# Altium PCB BOC1_06.PcbDoc (part 2 of 4)
Units mil, origin at the board's own origin, x right, y up, seen from the top; angles counter-clockwise.
Board outline 7900 x 6500 mil, 2 copper layers (Top Layer, Bottom Layer); 312 components, 413 nets, 1710 pads, 368 vias.
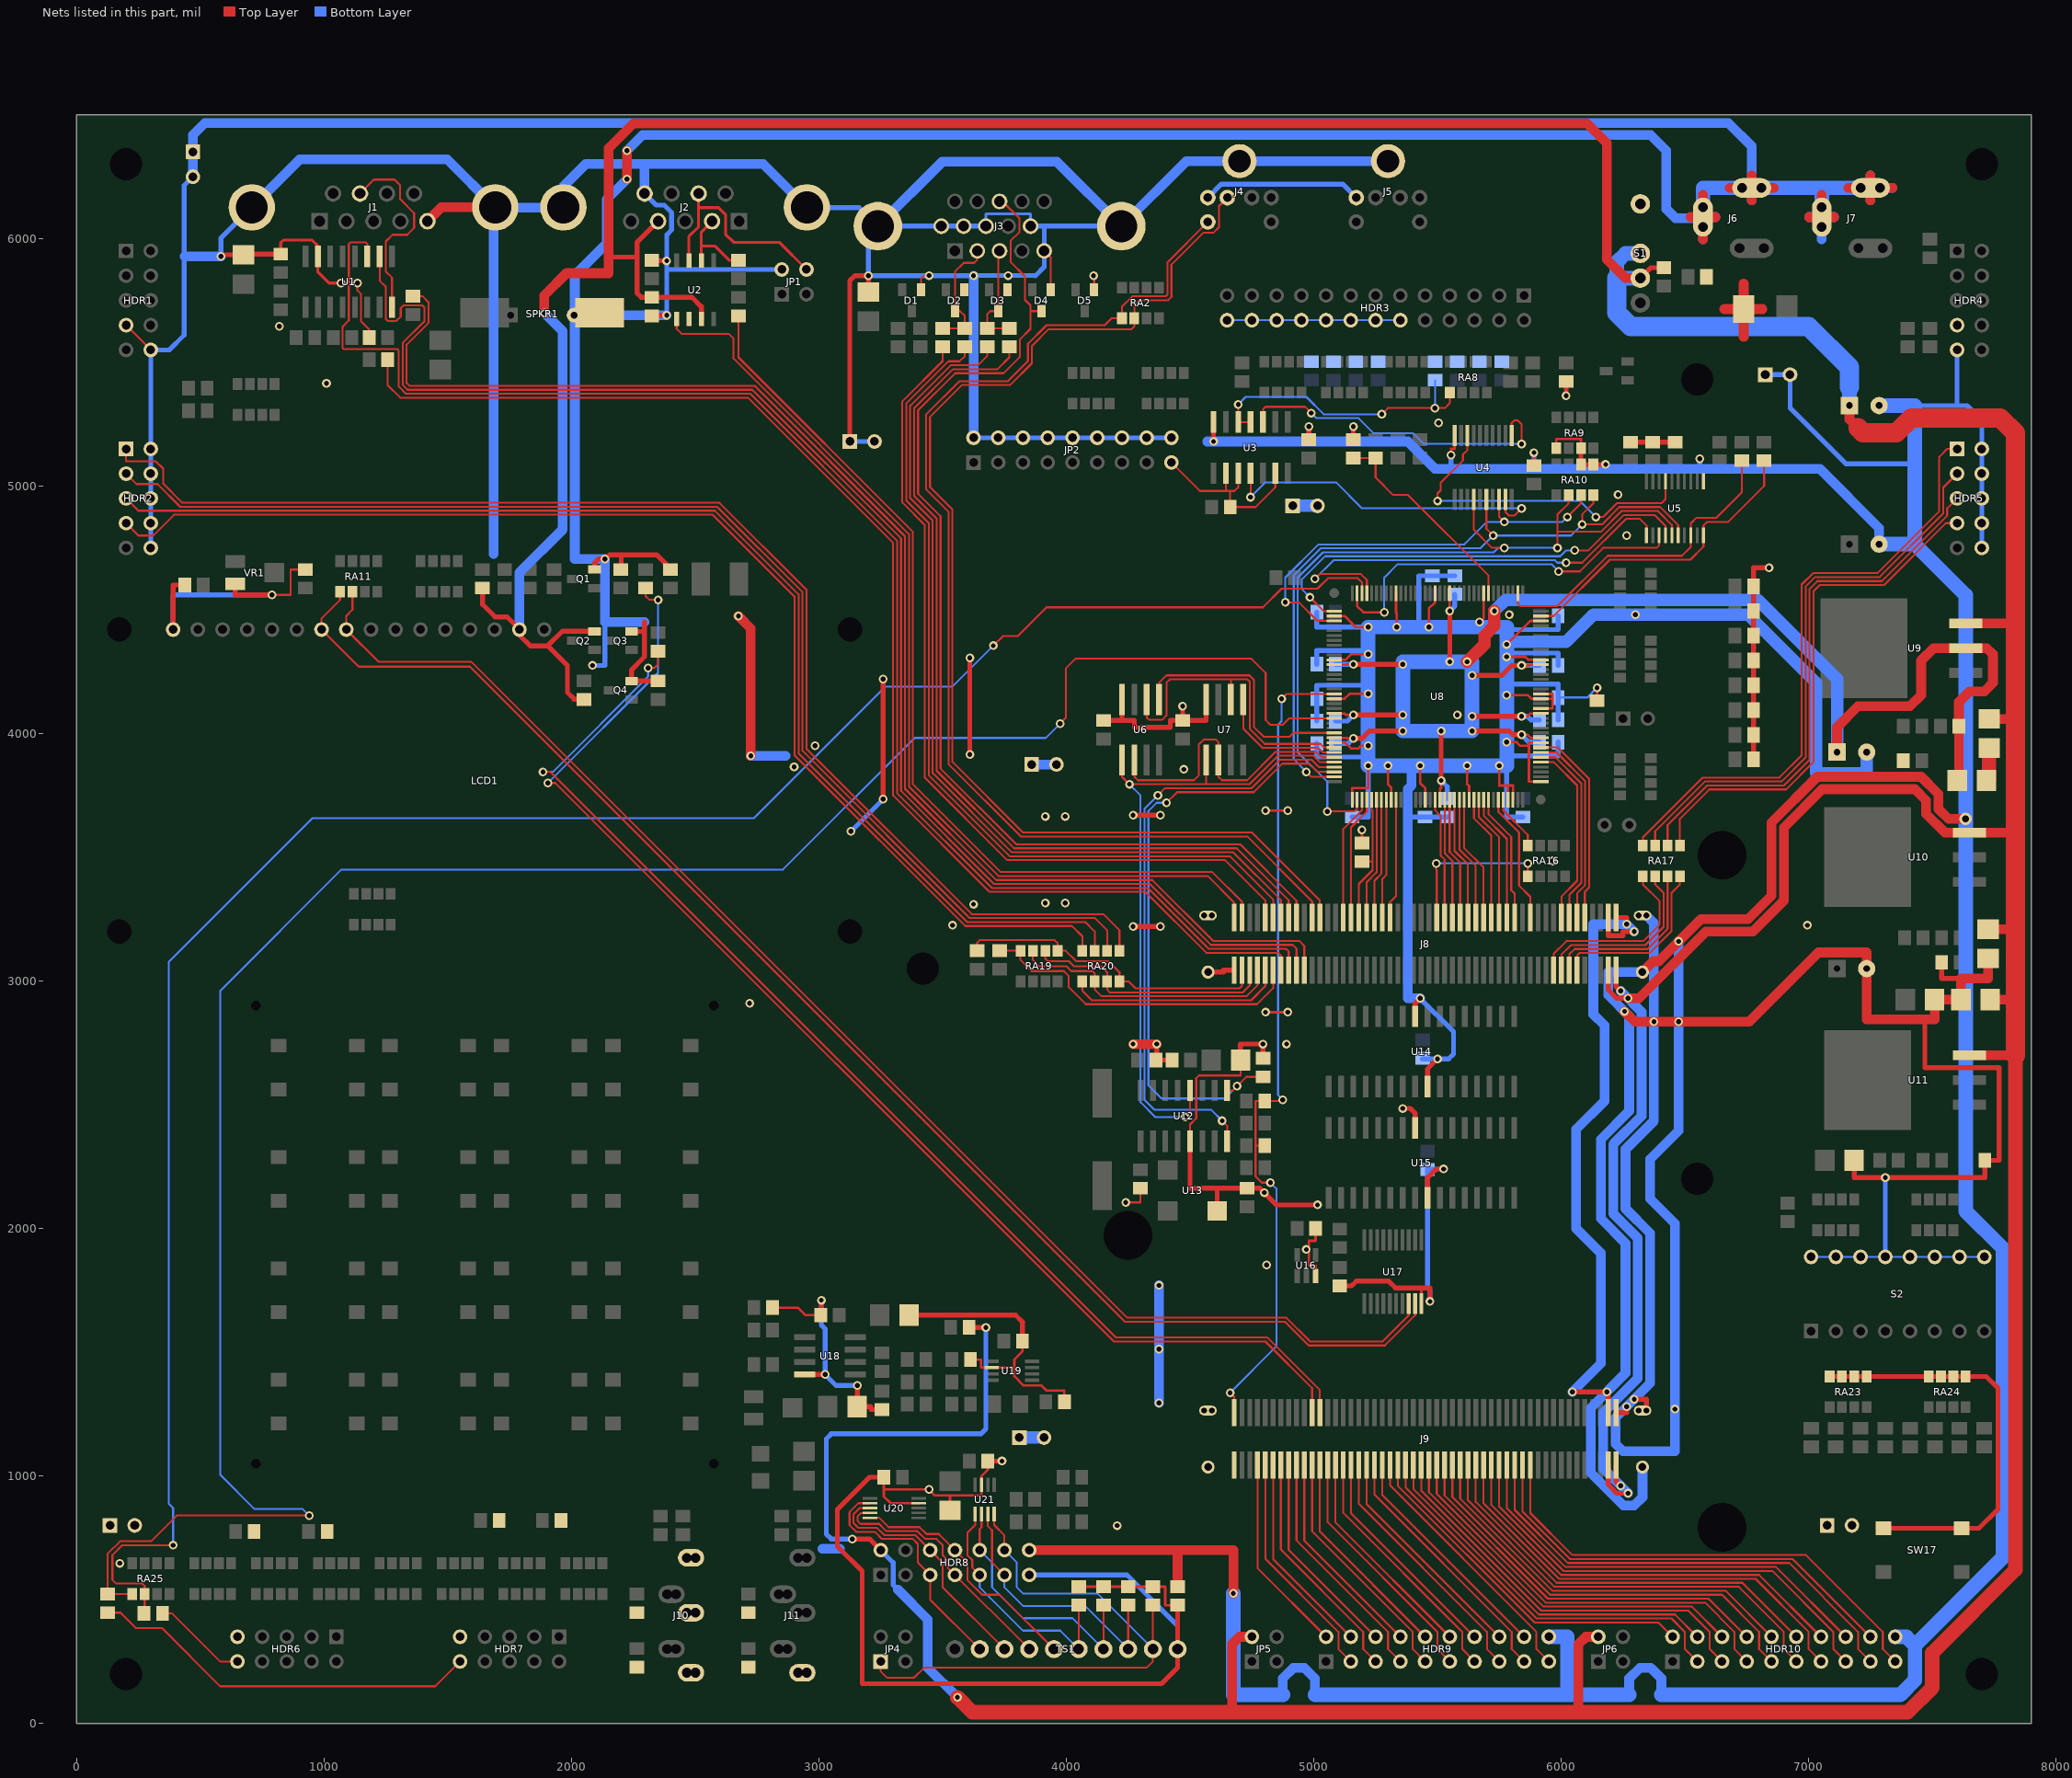
[diagram p2: the nets of this part, all layers, seen from the top]

## Via types
v1: diameter 35.43, hole 19.68, Top Layer to Bottom Layer, 194 vias
v2: diameter 35.43, hole 19.68, Top Layer to Bottom Layer, tented both sides, 169 vias
v3: diameter 50, hole 27.56, Top Layer to Bottom Layer, 5 vias

## Nets (pads, with @x,y where several pads share a name; then routed paths per layer and width w, separated by ;. In a path a pad name is that pad's centre, name@x,y a point inside that pad or via, vN(x,y) a via of type N, cw(c..) or ccw(c..) an arc to the next point about the centre after c; other vN are vias at no path point)
1V8: C21.1 C23.1 C58.1 C62.1 C63.1 C66.1 C67.1 C68.1 C69.1 C71.1 R42.1 U8.19 U8.46 U8.51 U8.61 U8.88 U8.120 U8.130 U8.135 U9.2 | length 7663.7
  Top Layer w9.84: U8.135@5082.68,3982.68 5132.32,3982.68 5135,3980 v1(5160,3980) ; U8.130@5082.68,4081.1 5123.9,4081.1 5130,4075 v1(5160,4075) ; U8.120@5082.68,4277.95 5132.95,4277.95 5135,4280 v1(5160,4280) ; U8.19@5509.84,3732.68 5509.84,3774.84 5515,3780 v1(5515,3810) ; v1@5549.21,4495.79 U8.88@5549.21,4567.32 ; v1(5840,3995) 5865,3995 5877.32,3982.68 U8.46@5917.32,3982.68 ; v1(5840,4070) 5865,4070 5876.1,4081.1 U8.51@5917.32,4081.1 ; v1(5840,4275) 5870,4275 5872.95,4277.95 U8.61@5917.32,4277.95
  Top Layer w19.68: v1(5160,3980) 5195,3980 5225,4010 v1(5360,4010) ; v1(5160,4075) v1(5360,4075) ; v1(5160,4280) v1(5360,4280) ; v1(5515,3810) v1(5515,4010) ; v1(5550,4290) v1(5550,4495) ; v1(5640,4010) 5790,4010 5805,3995 v1(5840,3995) ; v1(5640,4070) v1(5840,4070) ; v1(5640,4235) 5760,4235 5800,4275 v1(5840,4275)
  Top Layer w35.43: C23.1@7600.95,3810 7607.4,3816.46 R42.1@7607.4,4030
  Top Layer w39.37: C21.1@7115,3925 7115,4025 7200,4110 7410,4110 7455,4155 7455,4295 7505,4345 7720,4345 7745,4320 7745,4205 7710,4170 7650,4170 7607.4,4127.4 R42.1@7607.4,4030
  Top Layer w50: v1(5620,4290) 5690,4360 5690,4395 5730,4435 v1(5730,4495)
  Bottom Layer w19.68: C69.1@5087.4,3960 5140,3960 v1(5160,3980) ; C67.1@5087.4,4050 5135,4050 v1(5160,4075) ; C63.1@5087.4,4280 v1(5160,4280) ; v1(5515,3810) 5540,3785 C71.1@5540,3737.4 ; v1(5550,4495) 5570,4515 C58.1@5570,4562.6 ; v1(5840,3995) 5870,3965 C68.1@5912.6,3965 ; v1(5840,4070) 5862,4070 5877,4055 C66.1@5912.6,4055 ; v1(5840,4275) C62.1@5912.6,4275
  Bottom Layer w50: v1(5730,4495) 5775,4540 6795,4540 7115,4220 C21.1@7115,3925
  Bottom Layer w59.06: v1(5360,4010) 5360,4290 5640,4290 v1(5640,4010) v1(5360,4010)
5V: C4.1 C15.1 C22.1 C26.1 C27.1 HDR8.2 J2.4 J8.97 J8.99 J9.97 J9.99 JP5.2 JP6.2 LCD1.15 Q2.2 R5.1 R30.1 R38.1 R61.1 S1.1 S1.2 U2.3 U9.3 U10.3 U11.3 | length 29328.4
  Top Layer w19.68: R30.1@1641.48,4583.6 1641.48,4521.1 1691.57,4471 1740.43,4471 LCD1.15@1790.57,4420.86 ; LCD1.15@1791.54,4418.46 1791.54,4396.04 1833.57,4354 1904.57,4354 ; R38.1@2051.47,4138.6 2010.98,4138.6 1983.57,4166 1983.57,4275 1904.57,4354 ; Q2.2@2094.88,4413.4 1963.98,4413.4 1904.57,4354 ; 2150,5925 2265,5925 ; J2.4@2350.24,6070.08 2265,5984.84 2265,5780 2282.6,5762.4 2487.6,5762.4 2525,5725 U2.3@2525,5675 ; v1(3135,745) 3205,745 HDR8.2@3250,700 ; R61.1@3607.4,1600 v1(3675,1600) ; J9.97@6190.16,1043.7 6190.16,964.84 6225,930 v1(6270,930) ; J8.97@6190.16,3043.7 6190.16,2964.84 6225,2930 v1(6270,2930) ; J9.99@6221.65,1043.7 6221.65,978.35 v1(6240,960) ; J8.99@6221.65,3043.7 6221.65,2978.35 v1(6240,2960) ; S1.2@6320,5840 6362.4,5882.4 R5.1@6415,5882.4
  Top Layer w39.37: v2(1890,5700) 1890,5770 1980,5860 2150,5860 2150,6365 2250,6465 6105,6465 6185,6385 6185,5915 6260,5840 S1.2@6320,5840 ; 4670,45 4670,320 4700,350 JP5.2@4750,350 ; 6070,45 6070,320 6100,350 JP6.2@6150,350 ; v1(6270,2930) 6315,2930 6585,3200 6775,3200 6900,3325 6900,3620 7055,3775 7430,3775 7475,3730 7475,3675 7550,3600 7836,3600 ; C15.1@7165,5325 7165,5270 7200,5235 ; U9.3@7635,4445 7836,4445 ; U11.3@7650,2700 7836,2700 ; C27.1@7725,3209.05 7836,3209.05 ; C22.1@7730,4059.05 7836,4059.05 ; C26.1@7734.05,2925 7836,2925
  Top Layer w59.06: v1(3560,105) 3620,45 7400,45 7500,145 7500,285 7836,621 7836,2700
  Top Layer w78.74: 7200,5235 7220,5215 7355,5215 7415,5275 7775,5275 7836,5214 7836,2700
  Bottom Layer w19.68: v1(3135,745) 3050,745 3030,765 3030,1150 3050,1170 3655,1170 3675,1190 v1(3675,1600) ; HDR8.2@3250,700 3300,650 3300,560 3320,540
  Bottom Layer w39.37: LCD1.15@1790,4420 1790,4650 1965,4825 1965,5625 v2(1890,5700) ; 3320,540 3440,420 3440,225 v1(3560,105) ; v1(6240,2960) 6325,2875 6325,2455 6210,2340 6210,2060 6310,1960 6310,1395 6170,1255 6170,1030 v1(6270,930)
  Bottom Layer w59.06: S1.2@6320,5840 6225,5840 6225,5905 6260,5940 S1.1@6320,5940 ; C15.1@7165,5325 7165,5400
  Bottom Layer w78.74: 6225,5840 6225,5700 6280,5645 7000,5645 7165,5480 7165,5400
AGND: C36.2 C37.1 C38.2 C39.2 C41.2 C42.2 C44.2 C47.2 C48.2 C49.2 C50.2 C51.2 C52.2 C53.2 C54.2 C55.2 C56.2 C57.2 HDR8.13 J10.1 J10.1A J10.1B J10.3 J10.3A J10.3B J10.5 J10.5A J10.5B J11.1 J11.1A J11.1B R65.1 R80.2 TS1.10 U18.4 U19.2 U20.4 U21.7 | length 6959.1
  Top Layer w9.84: C36.2@2812.4,1680 2915,1680 2945,1650 C37.1@3010,1650 ; 3262.6,945 v1(3445,945) 3469,921 3657.2,921 3657.2,999.2 3682.4,1024.4 C49.2@3682.4,1060 ; C47.2@3262.6,995 3262.6,917.4 3290.32,889.68 U20.4@3403.43,889.68 ; C48.2@3530,860.94 3530,921 ; C41.2@3612.4,1470 3655,1470 3655,1437.8 3790,1437.8 ; C42.2@3822.4,1545 3822.4,1502.4 3790,1470 3790,1403 3828,1365 3900,1365 3920,1345 3992.4,1345 C44.2@3992.4,1300 ; C54.2@4050,552.4 4400,552.4 4400,477.6 R80.2@4450,477.6
  Top Layer w19.68: U18.4@2942.64,1410 v1(3025,1410) ; C37.1@3010,1650 v1(3010,1710) ; v1(3155,1365) 3155,1280 3210,1280 3210,1267.6 R65.1@3255,1267.6 ; C47.2@3260.78,995 C47.2@3262.6,995 3205,995 3075,865 3075,715 3175,615 3175,160 4385,160 4450,225 R80.2@4450,477.6 ; C38.2@3364.06,1650 3795,1650 3822.4,1622.6 C42.2@3822.4,1545 ; C49.2@3682.4,1060 v1(3740,1060)
  Bottom Layer w19.68: v1(3010,1710) 3010,1610 3025,1595 v1(3025,1410) 3070,1365 v1(3155,1365) ; HDR8.13@3850,600 4245,600 4450,395 TS1.10@4450,300
  Bottom Layer w39.37: 3015,705 3085,705
AIN0: C54.1 HDR8.9 TS1.6 U21.1 | length 1010.9
  Top Layer w7.87: U21.1@3631.61,845.94 3631.61,801.61 3600,770 3600,680 3620,660 3620,630 HDR8.9@3650,600 ; TS1.6@4050,300 C54.1@4050,477.6
  Bottom Layer w7.87: HDR8.9@3650,600 3650,550 3825,375 3975,375 TS1.6@4050,300
AIN1: C55.1 HDR8.10 TS1.7 U21.2 | length 1050.8
  Top Layer w7.87: HDR8.10@3650,700 3650,785 3657.2,792.2 U21.2@3657.2,845.94 ; TS1.7@4150,300 C55.1@4150,477.6
  Bottom Layer w7.87: HDR8.10@3650,700 3700,650 3700,550 3825,425 4025,425 TS1.7@4150,300
AIN2: C56.1 HDR8.11 TS1.8 U21.3 | length 1104.9
  Top Layer w7.87: U21.3@3682.8,845.94 3682.8,797.2 3700,780 3700,650 HDR8.11@3750,600 ; TS1.8@4250,300 C56.1@4250,477.6
  Bottom Layer w7.87: HDR8.11@3750,600 3750,550 3825,475 4075,475 TS1.8@4250,300
AIN3: C57.1 HDR8.12 JP4.1 TS1.9 U21.4 | length 2392.3
  Top Layer w7.87: JP4.1@3250,250 3250,210 3275,185 3385,185 3425,225 4325,225 4350,250 C57.1@4350,477.6 ; U21.4@3708.39,845.94 3708.39,801.61 3750,760 HDR8.12@3750,700
  Bottom Layer w7.87: HDR8.12@3750,700 3800,650 3800,550 3825,525 4125,525 TS1.9@4350,300
AOUT0: HDR8.5 TS1.2 U20.7 | length 986.4
  Top Layer w7.87: U20.7@3206.57,889.68 3159.68,889.68 3124,854 3124,801 3151,774 3226,774 3255,745 3380,745 3400,725 3400,650 HDR8.5@3450,600 3450,500 TS1.2@3650,300
AOUT1: HDR8.6 TS1.3 U20.8 | length 991.8
  Top Layer w7.87: U20.8@3206.57,870 3165,870 3140,845 3140,810 3160,790 3235,790 3264,761 3389,761 3500,650 3500,550 TS1.3@3750,300
AOUT2: HDR8.7 TS1.4 U20.9 | length 1023.5
  Top Layer w7.87: U20.9@3206.57,850.31 3170.31,850.31 3156,836 3156,819 3169,806 3244,806 3273,777 3398,777 3430,745 3475,745 3500,720 3500,680 3520,660 3520,630 TS1.4@3850,300
AOUT3: HDR8.8 TS1.5 U20.10 | length 1004.2
  Top Layer w7.87: U20.10@3206.57,830.63 3244.37,830.63 3282,793 3407,793 3435,765 3485,765 3600,650 3600,580 3660,520 3730,520 TS1.5@3950,300
AUDIO_SPI_CSN: J8.11 R46.1 RA19.8 | length 1343.1
  Top Layer w7.87: R46.1@3730,3122 RA19.8@3815,3122 3815,3085 3860,3040 3990,3040 4010,3020 4010,2975 4079,2906 4771,2906 4835.83,2970.83 J8.11@4835.83,3043.7
BLUE0: J8.14 R14.1 | length 3644.5
  Top Layer w7.87: R14.1@3680,5562.6 3680,5525 3643,5488 3533,5488 3369,5324 3369,4951 3460,4860 3460,3840 3780,3520 4675,3520 4867.32,3327.68 J8.14@4867.32,3256.3
BLUE1: J8.16 R15.1 | length 3725.5
  Top Layer w7.87: R15.1@3770,5562.6 3770,5520 3722,5472 3542,5472 3385,5315 3385,4960 3476,4869 3476,3849 3789,3536 4689,3536 4898.82,3326.18 J8.16@4898.82,3256.3
BLUE#: D3.3 J3.3 R14.2 R15.2 | length 442.4
  Top Layer w7.87: R14.2@3679.9,5637.4 R15.2@3769.9,5637.4 ; R14.2@3680,5637.4 3679.9,5693.9 3692.69,5706.69 D3.3@3725,5706.69 3725,5944.68 J3.3@3730.32,5950
BOC_CTS: J8.13 R9.1 | length 5324.1
  Top Layer w7.87: R9.1@1257.4,5510 1257.4,5407.6 1308,5357 2713,5357 3300,4770 3300,3750 3690,3360 4320,3360 4566,3114 4857,3114 4867.32,3103.68 J8.13@4867.32,3043.7
BOC_EN: U3.11 U4.19 | length 1394.9
  Top Layer w7.87: v2(4745,4955) U3.11@4745,5051.65 ; U4.19@5774.57,4946.06 5774.57,4895.43 5790,4880 5810,4880 v2(5840,4910)
  Bottom Layer w7.87: v2(4745,4955) 4805,5015 5090,5015 5195,4910 v2(5840,4910)
BOC_RTS: J8.17 U1.10 | length 6060.7
  Top Layer w7.87: U1.10@1225,5927.36 1225,5830 1250,5805 1250,5675 1258,5667 1292,5667 1310,5685 1310,5719 1321,5730 1397,5730 1406,5721 1406,5666 1318,5578 1318,5409 1338,5389 2731,5389 3332,4788 3332,3768 3708,3392 4338,3392 4584,3146 4915,3146 4930.31,3130.69 J8.17@4930.31,3043.7
BOC_RX: J8.19 R1.1 | length 5700.6
  Top Layer w7.87: R1.1@1360,5767.4 1397.6,5767.4 1422,5743 1422,5659 1334,5571 1334,5416 1345,5405 2740,5405 3348,4797 3348,3777 3717,3408 4347,3408 4593,3162 4941,3162 4961.81,3141.19 J8.19@4961.81,3043.7
BOC_TX: J8.15 U1.11 | length 6152.7
  Top Layer w7.87: U1.11@1175,5927.36 1175,5978 1169,5984 1106.27,5984 1100,5977.73 1100,5669 1075,5644 1075,5558 1080,5553 1296,5553 1302.25,5546.75 1302.25,5401.75 1331,5373 2722,5373 3316,4779 3316,3759 3699,3376 4329,3376 4575,3130 4888,3130 4898.82,3119.18 J8.15@4898.82,3043.7
BOOT_EN: U3.3 U4.1 | length 1344.3
  Top Layer w7.87: U3.3@4795,5258.35 4795,5310 4805,5320 4965,5320 v2(4990,5295) ; U4.1@5800.16,5203.94 5800.16,5255.16 5810,5265 5825,5265 5840,5250 v2(5840,5170)
  Bottom Layer w7.87: v2(4990,5295) 5011,5274 5181,5274 5242,5213 5402,5213 5445,5170 v2(5840,5170)
BOOT_JTAG_EN: JP2.17 R28.1 U3.9 U3.10 U3.13 | length 789.5
  Top Layer w7.87: JP2.17@4425,5095 4540,4980 4680,4980 4695,4995 U3.10@4695,5051.65 ; 4645,4980 U3.9@4645,5051.65 ; 4662.4,4980 R28.1@4662.4,4915 4765,4915 4845,4995 U3.13@4845,5051.65
BOOT_TCK: RA10.4 U4.16 U5.6 U8.143 | length 2969.7
  Top Layer w7.87: v1(4970,3845) 4989.8,3825.2 U8.143@5082.68,3825.2 ; U4.16@5697.8,4946.06 5697.8,4827.2 v2(5725,4800) ; RA10.4@6130,4963 6130,4930 6085,4885 v2(6085,4845) 6165,4845 6235,4915 6400,4915 6472.8,4842.2 U5.6@6472.8,4800.75
  Bottom Layer w7.87: v1(4970,3845) 4919,3896 4919,4639 5028,4748 5673,4748 v2(5725,4800) 6040,4800 v2(6085,4845)
BOOT_TDI: RA10.3 U4.18 U8.111 | length 1780.7
  Top Layer w7.87: v1(4885,4530) 4940,4530 5014.88,4455.12 U8.111@5082.68,4455.12 ; U4.18@5748.98,4946.06 5748.98,4876.02 v2(5770,4855) ; v2(6025,4875) 6080,4930 RA10.3@6080,4963
  Bottom Layer w7.87: v1(4885,4530) 4885,4630 5019,4764 5609,4764 5700,4855 6005,4855 v2(6025,4875)
BOOT_TDO: U4.8 U5.17 | length 1364.9
  Top Layer w7.87: v2(5500,4940) 5500,4970 5513,4983 5513,5013 5603,5103 5603,5128 5621.02,5146.02 U4.8@5621.02,5203.94 ; v2(6140,4875) 6170,4875 6226,4931 6406,4931 6421.61,4946.61 U5.17@6421.61,5019.25
  Bottom Layer w7.87: v2(5500,4940) 6075,4940 v2(6140,4875)
BOOT_TDO-TDI: U5.4 U8.109 | length 1841
  Top Layer w7.87: v1(4985,4550) 5040.51,4494.49 U8.109@5082.68,4494.49 ; v1(6055,4740) 6110,4740 6253,4883 6377,4883 6421.61,4838.39 U5.4@6421.61,4800.75
  Bottom Layer w7.87: v1(4985,4550) 4951,4584 4951,4621 5046,4716 5996,4716 6020,4740 v1(6055,4740)
BOOT_TMS: RA10.2 U4.14 U5.5 U8.2 | length 3326.7
  Top Layer w7.87: v1(5055,3685) 5165,3685 5175.2,3695.2 U8.2@5175.2,3732.68 ; U4.14@5646.61,4946.06 5646.61,4823.39 5720,4750 v1(5770,4750) ; v1(5985,4750) 5985,4885 6030,4930 RA10.2@6030,4963 ; 5985,4815 6160,4815 6244,4899 6391,4899 6447.2,4842.8 U5.5@6447.2,4800.75
  Bottom Layer w7.87: v1(5055,3685) 5055,3805 4935,3925 4935,4630 5037,4732 5727,4732 5745,4750 v1(5985,4750)
BUZZER: J9.24 R37.1 | length 4983.6
  Top Layer w7.87: v2(1885,3845) 1915,3845 4201,1559 4813,1559 5024.8,1347.2 J9.24@5024.8,1256.3 ; v2(2310,4265) 2335,4265 2350,4280 R37.1@2350,4332.6
  Bottom Layer w7.87: v2(1885,3845) 1925,3845 2310,4230 v2(2310,4265)
C_CTRL: C76.1 R22.2 U8.80 | length 859.6
  Top Layer w7.87: C76.1@5160,5112.6 R22.2@5250,5112.6 5250,5035 5321,4964 5381,4964 5706.69,4638.31 U8.80@5706.69,4567.32
C_SPI_CLK: U6.6 U7.6 U8.139 | length 1229.3
  Top Layer w7.87: U6.6@4275,3892.95 4275,3825 4289,3811 4516,3811 4535,3830 4535,3955 4555,3975 4605,3975 4615,3965 4615,3825 4629,3811 4731,3811 4846,3926 5009,3926 5031.06,3903.94 U8.139@5082.68,3903.94
C_SPI_CLOCK_CLK: U8.141 U12.8 | length 2477.3
  Top Layer w7.87: v1(4370,3750) 4399,3779 4749,3779 4864,3894 4991,3894 5020.43,3864.57 U8.141@5082.68,3864.57 ; v2(4630,2435) 4650,2415 U12.8@4650,2352.64
  Bottom Layer w7.87: v1(4370,3750) 4316,3696 4316,2519 4355,2480 4585,2480 v2(4630,2435)
C_SPI_CLOCK_SEL: R50.1 U8.142 U12.9 | length 2521.1
  Top Layer w7.87: v1(4405,3720) 4448,3763 4758,3763 4873,3878 4982,3878 5015.12,3844.88 U8.142@5082.68,3844.88 ; U12.9@4650,2557.36 4672.36,2557.36 4727.6,2612.6 R50.1@4795,2612.6
  Bottom Layer w7.87: v1(4405,3720) 4365,3720 4332,3687 4332,2578 4385,2525 4640,2525 v1(4690,2575)
C_SPI_DIN: U6.5 U7.5 U8.140 U12.12 | length 2718.4
  Top Layer w7.87: U6.5@4225,3892.95 4225,3825 v1(4255,3795) 4740,3795 4855,3910 5000,3910 5025.75,3884.25 U8.140@5082.68,3884.25 ; v2(4480,2450) 4500,2470 U12.12@4500,2557.36 ; 4565,3795 U7.5@4565,3892.95
  Bottom Layer w7.87: v1(4255,3795) 4300,3750 4300,2510 4360,2450 v2(4480,2450)
C_SPI_DOUT: U6.2 U7.2 U8.137 | length 1286.6
  Top Layer w7.87: U6.2@4325,4137.05 4325,4065 4335,4055 4387,4055 4405,4073 4405,4205 4419,4219 4731,4219 4742,4208 4742,4018 4802,3958 5027,3958 5041.69,3943.31 U8.137@5082.68,3943.31 ; U7.2@4665,4137.05 4665,4219
C_SPI_SEL_FLSH1: U7.1 U8.138 | length 524.6
  Top Layer w7.87: U7.1@4715,4137.05 4715,4020 4793,3942 5018,3942 5036.38,3923.62 U8.138@5082.68,3923.62
C_SPI_SEL_FLSH2: U6.1 U8.134 | length 1008.4
  Top Layer w7.87: U6.1@4375,4137.05 4375,4205 4405,4235 4740,4235 4758,4217 4758,4027 4798,3987 4902,3987 4917.36,4002.36 U8.134@5082.68,4002.36
CAN_RXD: J8.4 R4.1 | length 3775
  Top Layer w7.87: R4.1@2675,5687.6 2675,5520 3380,4815 3380,3795 3735,3440 4590,3440 4709.84,3320.16 J8.4@4709.84,3256.3
CAN_TXD: J8.2 U2.1 | length 3958.4
  Top Layer w7.87: U2.1@2425,5675 2425,5635 2445,5615 2635,5615 2655,5595 2655,5515 3364,4806 3364,3786 3726,3424 4571,3424 4678.35,3316.65 J8.2@4678.35,3256.3
CANH: J2.7 JP1.4 U2.7 | length 872.3
  Top Layer w11.81: U2.7@2475,5911.22 2475,6009 2513.83,6047.83 J2.7@2513.83,6180.89 ; 2513.83,6125 2595,6125 2622.88,6097.12 2622.88,6017.12 2655,5985 2840,5985 JP1.4@2950,5875
CANL: J2.2 R3.2 U2.6 | length 349.7
  Top Layer w11.81: U2.6@2525,5911.22 2525,6025.73 J2.2@2568.35,6069.08 ; 2525,5970 2579,5970 2636.6,5912.4 R3.2@2675,5912.4
CCLK: U5.3 U8.107 | length 1541.6
  Top Layer w7.87: v1(5990,4655) 6075,4655 6170,4750 6385,4750 6396.02,4761.02 U5.3@6396.02,4800.75
  Top Layer w9.84: U8.107@5175.2,4567.32 5175.2,4514.8 5200,4490 v2(5285,4490)
  Bottom Layer w7.87: v2(5285,4490) 5285,4630 5339,4684 5961,4684 v1(5990,4655)
CTRL: C84.1 RA8.1 U3.4 U3.5 | length 1192.3
  Top Layer w7.87: v2(4695,5330) U3.5@4695,5258.35 U3.4@4745,5258.35 ; v2(5275,5290) 5300,5315 5530,5315 5550,5335 RA8.1@5550,5378
  Bottom Layer w7.87: v2(4695,5330) 4725,5360 4970,5360 5040,5290 v2(5275,5290) ; v2(5490,5315) C84.1@5490,5427.6
CTS: J1.7 U1.8 | length 803
  Top Layer w7.87: J1.7@1145.47,6181.89 1201.58,6238 1285,6238 1308,6215 1308,6159 1364,6103 1364,6043 1336,6015 1277,6015 1250,5988 1250,5867 1275,5842 U1.8@1275,5722.64
DIN: U5.1 U8.105 | length 1779.2
  Top Layer w7.87: v2(5005,4625) 5024,4644 5191,4644 5214.57,4620.43 U8.105@5214.57,4567.32 ; v1(6020,4690) 6085,4690 6262,4867 6318,4867 6344.84,4840.16 U5.1@6344.84,4800.75
  Bottom Layer w7.87: v2(5005,4625) 5080,4700 5975,4700 5985,4690 v1(6020,4690)
DONE: R27.2 U5.10 U8.71 | length 1270.3
  Top Layer w7.87: U8.71@5917.32,4474.8 5969.8,4474.8 6197,4702 6522,4702 6575.16,4755.16 6575.16,4840.16 6589,4854 6674,4854 6820.16,5000.16 R27.2@6820,5100.2
FPGA_AUX0: J8.86 U8.41 | length 746.9
  Top Layer w7.87: U8.41@5917.32,3884.25 5970.75,3884.25 6065,3790 6065,3405 6001.18,3341.18 J8.86@6001.18,3256.3
FPGA_AUX1: J8.88 U8.42 | length 769.9
  Top Layer w7.87: U8.42@5917.32,3903.94 5976.06,3903.94 6081,3799 6081,3396 6032.68,3347.68 J8.88@6032.68,3256.3
FPGA_AUX2: J8.90 U8.43 | length 792.9
  Top Layer w7.87: U8.43@5917.32,3923.62 5981.38,3923.62 6097,3808 6097,3387 6064.17,3354.17 J8.90@6064.17,3256.3
FPGA_AUX3: J8.92 U8.44 | length 815.9
  Top Layer w7.87: U8.44@5917.32,3943.31 5986.69,3943.31 6113,3817 6113,3378 6095.67,3360.67 J8.92@6095.67,3256.3
FPGA_CCLK: J8.66 U8.24 | length 508.7
  Top Layer w7.87: U8.24@5608.27,3732.68 5608.27,3536.73 5686.22,3458.78 J8.66@5686.22,3256.3
FPGA_CLK: J9.2 R51.2 R53.2 U8.126 | length 3402.3
  Top Layer w7.87: v1(4662,1336) 4678.35,1319.65 J9.2@4678.35,1256.3 ; 4765,2335 R53.2@4802.4,2335 ; v2(4825,2185) 4790,2185 4765,2210 4765,2515 4870,2515 v1(4875,2520) ; v1(4870,4140) 4889.84,4159.84 U8.126@5082.68,4159.84
  Bottom Layer w7.87: v1(4662,1336) 4849,1523 4849,2161 v2(4825,2185) ; v1(4870,4140) 4870,4050 4856,4036 4856,2539 v1(4875,2520)
FPGA_CLK_1: J8.30 U8.3 | length 507.7
  Top Layer w7.87: J8.30@5119.29,3256.3 5119.29,3614.29 5194.88,3689.88 U8.3@5194.88,3732.68
FPGA_CLK_2: J8.32 U8.4 | length 502.8
  Top Layer w7.87: J8.32@5150.79,3256.3 5150.79,3620.79 5214.57,3684.57 U8.4@5214.57,3732.68
FPGA_DIN: J8.64 U8.23 | length 503.8
  Top Layer w7.87: U8.23@5588.58,3732.68 5588.58,3531.42 5654.72,3465.28 J8.64@5654.72,3256.3
FPGA_DONE: J8.74 U8.29 | length 520.1
  Top Layer w7.87: U8.29@5706.69,3732.68 5706.69,3673.31 5798,3582 5798,3367 5812.21,3352.79 J8.74@5812.21,3256.3
FPGA_ID0: J8.42 U8.10 | length 486.5
  Top Layer w7.87: J8.42@5308.27,3256.3 5308.27,3318.27 5332.68,3342.68 U8.10@5332.68,3732.68
FPGA_ID1: J8.40 U8.8 | length 483.2
  Top Layer w7.87: J8.40@5276.77,3256.3 5276.77,3411.77 5293.31,3428.31 U8.8@5293.31,3732.68
FPGA_ID2: J8.38 U8.7 | length 488.1
  Top Layer w7.87: J8.38@5245.28,3256.3 5245.28,3405.28 5273.62,3433.62 U8.7@5273.62,3732.68
FPGA_ID3: J8.36 U8.6 | length 493
  Top Layer w7.87: J8.36@5213.78,3256.3 5213.78,3398.78 5253.94,3438.94 U8.6@5253.94,3732.68
FPGA_INIT: J8.68 U8.26 | length 505.4
  Top Layer w7.87: U8.26@5647.64,3732.68 5647.64,3657.36 5717.72,3587.28 J8.68@5717.72,3256.3
FPGA_INSTALLED: J8.34 R44.2 U8.5 | length 544
  Top Layer w7.87: J8.34@5182.28,3256.3 5182.28,3392.28 5238,3448 5238,3687 5234.25,3690.75 U8.5@5234.25,3732.68 ; R44.2@5195,3482.6 5238,3482.6
FPGA_M0: J8.60 U8.21 | length 494
  Top Layer w7.87: U8.21@5549.21,3732.68 5549.21,3520.79 5591.73,3478.27 J8.60@5591.73,3256.3
FPGA_M1: J8.58 U8.20 | length 489.1
  Top Layer w7.87: U8.20@5529.53,3732.68 5529.53,3515.47 5560.24,3484.76 J8.58@5560.24,3256.3
FPGA_M2: J8.56 U8.18 | length 492.4
  Top Layer w7.87: U8.18@5490.16,3732.68 5490.16,3689.84 5513,3667 5513,3507 5528.74,3491.26 J8.56@5528.74,3256.3
FPGA_PROGRAM: J8.62 U8.22 | length 498.9
  Top Layer w7.87: U8.22@5568.9,3732.68 5568.9,3526.1 5623.23,3471.77 J8.62@5623.23,3256.3
FPGA_TCK: J8.72 U8.28 | length 515.2
  Top Layer w7.87: U8.28@5687.01,3732.68 5687.01,3667.99 5780.71,3574.29 J8.72@5780.71,3256.3
FPGA_TDI: J8.78 U8.31 | length 529.9
  Top Layer w7.87: U8.31@5746.06,3732.68 5746.06,3683.94 5830,3600 5830,3385 5875.2,3339.8 J8.78@5875.2,3256.3
FPGA_TDO: J8.54 RA16.1 | length 641.6
  Top Layer w7.87: v1(5495,3475) 5495,3450 5497.24,3447.76 J8.54@5497.24,3256.3 ; RA16.1@5865,3423 v1(5865,3475)
  Bottom Layer w7.87: v1(5495,3475) v1(5865,3475)
FPGA_TDO#: RA16.8 U8.32 | length 226.8
  Top Layer w7.87: U8.32@5765.75,3732.68 5765.75,3689.25 5865,3590 RA16.8@5865,3547
FPGA_TMS: J8.70 U8.27 | length 510.3
  Top Layer w7.87: U8.27@5667.32,3732.68 5667.32,3662.68 5749.21,3580.79 J8.70@5749.21,3256.3
GND: C1.2 C2.2 C4.2 C5.2 C8.2 C10.2 C11.2 C12.1 C13.1 C14.1 C15.2 C16.2 C17.2 C18.2 C19.1 C20.2 C21.2 C22.2 C23.2 C24.2 C25.2 C26.2 C27.2 C28.2 C29.2 C30.2 C31.2 C32.2 C33.2 C34.2 C35.2 C58.2 C59.2 C60.2 C61.2 C62.2 C63.2 C64.2 C65.2 C66.2 C67.2 C68.2 C69.2 C70.2 C71.2 C72.2 C73.2 C74.2 C75.2 C76.2 C77.2 C78.2 C79.2 C80.2 C81.2 C82.2 C83.2 C84.2 C85.2 C86.2 C87.2 C88.2 D1.1 D2.1 D3.1 D4.1 D5.1 D7.1 GJ1.1 GJ1.2 GJ2.1 GJ2.2 GJ3.1 GJ3.2 GJ4.1 GJ4.2 GJ5.1 GJ5.2 GJ6.1 GJ6.2 GJ7.1 GJ7.2 GJ8.1 GJ8.2 HDR1.7 HDR1.10 HDR2.2 HDR2.4 HDR2.6 HDR2.8 HDR2.10 HDR3.19 HDR3.20 HDR3.21 HDR3.22 HDR3.23 HDR3.24 HDR3.25 HDR3.26 HDR4.7 HDR4.9 HDR5.2 HDR5.4 HDR5.6 HDR5.8 HDR5.10 HDR6.9 HDR7.9 HDR8.14 HDR9.20 HDR10.20 J1.5 J1.10 J1.11 J2.9 J2.10 J2.11 J3.5 J3.6 J3.7 J3.8 J3.10 J3.16 J3.17 J4.3 J4.S J5.3 J5.S J6.2 J6.2A J6.2B J6.3 J6.3A J6.3B J7.2 J7.2A J7.2B J7.3 J7.3A J7.3B J8.1 J8.98 J8.100 J8.MH1 J8.MH2 J8.MH2A J8.MH2B J8.MH3 J8.MH4 J8.MH4A J8.MH4B J9.1 J9.98 J9.100 J9.MH1 J9.MH2 J9.MH2A J9.MH2B J9.MH3 J9.MH4 J9.MH4A J9.MH4B JP1.2 JP2.2 JP2.4 JP2.6 JP2.8 JP2.10 JP2.12 JP2.14 JP2.16 JP2.18 LCD1.1 LED8.2 LED9.2 LED10.2 LED11.2 LED12.2 LED13.2 LED14.2 LED15.2 LED16.2 Q1.2 Q3.2 Q4.2 R2.1 R19.2 R29.2 R34.1 R39.2 R40.1 R43.2 R44.1 R49.1 R50.2 R58.2 R80.1 RA9.1 RA9.3 RA10.5 RA10.6 RA23.5 RA23.6 RA23.7 RA23.8 RA24.5 RA24.6 RA24.7 RA24.8 S1.M S2.9 S2.10 S2.11 S2.12 S2.13 S2.14 S2.15 S2.16 SPKR1.2 SPKR1.2A SW17.3 SW17.4 U1.15 U2.2 U3.7 U4.10 U5.11 U6.4 U7.4 U8.1 U8.9 U8.16 U8.25 U8.33 U8.34 U8.37 U8.45 U8.52 U8.54 U8.55 U8.62 U8.70 U8.81 U8.91 U8.99 U8.110 U8.119 U8.127 U8.136 U12.5 U13.2 U14.9 U14.25 U15.9 U15.25 U16.3 U17.10 VR1.CCW | length 92487.9
  Top Layer w7.87: HDR1.7@200,5650 HDR1.10@300,5550 ; v2(790,4560) 865,4560 865,4662.4 R29.2@925,4662.4 ; v2(1135,5820) 1135,5790 1149.8,5775.2 1149.8,5665 1182.6,5632.2 C8.2@1182.6,5600 ; D1.1@3412.4,5793.31 3412.4,5837.4 3425.39,5850.39 v1(3445,5850.39) ; J3.5@3910.63,5950 3937.4,5923.23 D4.1@3937.4,5793.31 ; v2(4110,5850) 4112.4,5847.6 D5.1@4112.4,5793.31 ; v2(4240,2105) 4300,2105 C31.2@4300,2162.6 ; U12.5@4500,2352.64 4500,2420 4525,2445 4525,2607 4536,2618 4704.06,2618 C30.2@4704.06,2680
  Top Layer w9.84: v1(4805,2873.68) v1(4895,2873.68) ; v1(4805,3688.57) v1(4895,3688.57) ; U16.3@5007.4,1807.68 5007.4,1850 4980,1850 4980,1950 5007.4,1950 C33.2@5007.4,2000 ; U8.136@5082.68,3962.99 5127.01,3962.99 5150,3940 5180,3940 5190,3950 v1(5220,3950) ; U8.127@5082.68,4140.16 5125.16,4140.16 5145,4160 v1(5220,4160) ; U8.119@5082.68,4297.64 5127.64,4297.64 5150,4320 v1(5220,4320) ; U8.110@5082.68,4474.8 5125.2,4474.8 5170,4430 v1(5220,4430) ; U8.1@5155.51,3732.68 5155.51,3780 5220,3780 v1(5220,3870) ; R44.1@5195,3557.4 v1(5195,3610) ; v1(5300,3870) 5300,3795 5312.99,3782.01 U8.9@5312.99,3732.68 ; U8.99@5332.68,4567.32 5332.68,4487.32 5335,4485 v1(5335,4430) ; v1(5430,3870) 5430,3800 5450.79,3779.21 U8.16@5450.79,3732.68 ; v1(5465,4430) 5465,4505 5490.16,4530.16 U8.91@5490.16,4567.32 ; v2(5555,5125) 5555,5150 5569.84,5150 U4.10@5569.84,5203.94 ; v1(5620,3870) 5620,3795 5627.95,3787.05 U8.25@5627.95,3732.68 ; v1(5670,4450) 5687.01,4467.01 U8.81@5687.01,4567.32 ; v1(5750,3870) 5750,3790 5805.12,3790 U8.34@5805.12,3732.68 ; v1(5780,3965) 5820,3965 5835,3950 5870,3950 ; v1(5780,4155) 5865,4155 5879.84,4140.16 5965,4140.16 ; v1(5780,4310) 5855,4310 5867.36,4297.64 U8.62@5917.32,4297.64 ; v1(5780,4360) 5875.12,4455.12 U8.70@5917.32,4455.12 ; U8.33@5785.43,3732.68 5785.43,3790 ; C11.2@5890,5082.4 v1(5890,5135) ; U8.37@5917.32,3805.51 5870,3805.51 5870,3962.99 U8.45@5917.32,3962.99 ; U8.52@5917.32,4100.79 5965,4100.79 5965,4159.84 U8.55@5917.32,4159.84 ; RA9.1@5980,5153 5980,5190 6080,5190 RA9.3@6080,5153 ; R40.1@6145,4132.4 v1(6145,4185)
  Top Layer w11.81: C2.2@825,5937.4 824.9,5982.9 836,5994 952,5994 975,5971 975,5865 1020,5820 v2(1069,5820) ; U17.10@5435.16,1696.06 5435.16,1760
  Top Layer w19.68: LCD1.1@390,4420 390,4600 C17.2@437.6,4600 ; v2(583,5928) 589.06,5934.06 C1.2@675,5934.06 675,5937.4 C2.2@825,5937.4 ; VR1.CCW@641,4598 641,4560 v2(790,4560) ; Q1.2@2094.88,4663.4 2094.88,4691.31 2109.57,4706 2138.57,4706 2154.57,4722 2344.57,4722 C18.2@2401.48,4665.1 ; 2201.57,4722 2201.57,4663.5 R34.1@2201.67,4663.4 ; Q3.2@2243.31,4412.4 2295,4412.4 ; 2295,4450 2295,4310 2243.31,4258.31 Q4.2@2243.31,4212.4 R39.2@2350,4212.4 ; C4.2@2340,5690 v2(2385,5690) ; R2.1@2340,5910 v2(2385,5910) ; GJ2.1@3125,5180 3125,5830 3145,5850 v2(3200,5850) C5.2@3200,5784.06 ; v2(3260,3735) v2(3260,4220) ; v2(3610,3915) v2(3610,4305) ; C19.1@4150,4052.4 4275,4052.4 4275,4025 4420,4025 4420,4052.4 4565,4052.4 U7.4@4565,4137.05 ; 4225,4052.4 U6.4@4225,4137.05 ; v2(4270,3220) v2(4380,3220) ; v2(4270,3670) v2(4380,3670) ; v2(4365,2745) 4365,2680 C29.2@4427.6,2680 ; C20.2@4470,4052.4 v2(4470,4110) ; U12.5@4500,2352.64 4500,2162.4 4782.6,2162.4 4850,2095 v2(5015,2095) ; J8.MH1@4572.73,3035.83 4635,3035.83 4635,3043.7 J8.1@4678.35,3043.7 ; v2(4595,5180) U3.7@4595,5258.35 ; U13.2@4610,2070.75 4610,2162.4 ; C30.2@4704.06,2680 4704.06,2745 v2(4795,2745) R50.2@4795,2687.4 ; C10.2@4980,5187.4 v2(4980,5240) ; C34.2@5105,1767.6 5152.6,1767.6 5172,1787 5303,1787 5330,1760 5470,1760 v2(5470,1705) ; C76.2@5160,5192.4 v2(5160,5240) ; v2(5360,2485) 5390,2485 5410,2465 U15.25@5410,2406.73 ; U14.25@5410,2856.73 5410,2910 v2(5430,2930) ; U15.9@5460,2123.27 5460,2205 5495,2240 v2(5525,2240) ; U14.9@5460,2573.27 5460,2645 v2(5500,2685) ; v1(6020,5365) R19.2@6020,5422.6 ; v1(6045,1340) 6190.16,1340 J9.98@6190.16,1256.3 ; RA9.3@6080,5153 RA10.6@6080,5087 v1(6180,5087) ; J8.98@6190.16,3256.3 6190.16,3183 6250,3183 6250,3200 v1(6295,3200) ; J9.100@6221.65,1256.3 6265,1256.3 v1(6265,1280) ; J8.100@6221.65,3256.3 6265,3256.3 v1(6265,3230) ; C12.1@6280,5177.4 C13.1@6370,5177.4 C14.1@6460,5177.4 ; v1(6295,1310) 6344.38,1310 J9.MH4B@6344.38,1264.17 ; LED16.2@6777.4,3895 6777.4,4670 v1(6840,4670) ; RA23.8@7085,1402 7718,1402 7765,1355 7765,865 7688.19,788.19 SW17.4@7302.52,788.19 ; C35.2@7184.06,2275 7184.06,2205 7712.4,2205 R58.2@7712.4,2275 7770,2275 7770,2650 7470,2650 7470,2845 ; R49.1@7537.6,3075 7537.6,3010 7615.94,3010
  Top Layer w39.37: J1.5@1418.11,6070.08 1474.01,6125.98 J1.11@1691.93,6125.98 ; v2(2224,6240) v2(2224,6355) ; v1(2675,4475) 2725,4425 v2(2725,3910) ; HDR8.14@3850,700 4675,700 v2(4675,525) ; v1(4270,2745) v2(4365,2745) ; R80.1@4450,552.4 4450,700 ; v1(6256,2877) 6298,2835 6760,2835 7040,3115 7235,3115 7235,2845 7509.06,2845 C25.2@7509.06,2925 C26.2@7615.94,2925 7615.94,3010 7725,3010 C27.2@7725,3090.94 ; J8.MH3@6328.63,3035.83 6372.81,3080 6395,3080 6565,3250 6755,3250 6850,3345 6850,3640 7035,3825 7455,3825 7525,3755 7525,3695 7565,3655 v3(7635,3655) ; 6523.15,6086.61 J6.3@6573.15,6086.61 6623.15,6086.61 ; 6573.15,5997.24 J6.3B@6573.15,6047.24 ; J6.3A@6573.15,6125.98 6573.15,6175.98 ; 6659.41,5715 D7.1@6737.5,5715 ; 6680.63,6204.72 J6.2A@6730.63,6204.72 ; 6737.5,5602.85 D7.1@6737.5,5715 ; 6737.5,5817.38 D7.1@6737.5,5715 ; 6770,6154.72 J6.2@6770,6204.72 6770,6254.72 ; J6.2B@6809.37,6204.72 6859.37,6204.72 ; 6812.59,5715 D7.1@6737.5,5715 ; 7003.15,6086.61 J7.3@7053.15,6086.61 7103.15,6086.61 ; J7.3A@7053.15,6125.98 7053.15,6175.98 ; 7160.63,6204.72 J7.2A@7210.63,6204.72 ; 7250,6154.72 J7.2@7250,6204.72 7250,6254.72 ; J7.2B@7289.37,6204.72 7339.37,6204.72
  Top Layer w59.05: C23.2@7729.05,3810 7729.05,3940 C22.2@7730,3940.94
  Bottom Layer w7.87: v2(1069,5820) v2(1135,5820) ; HDR3.26@4650,5670 HDR3.25@4750,5670 HDR3.24@4850,5670 HDR3.23@4950,5670 HDR3.22@5050,5670 HDR3.21@5150,5670 HDR3.20@5250,5670 HDR3.19@5350,5670 ; S2.16@7007.72,1884.65 7107.72,1884.65 7207.72,1884.65 7407.72,1884.65 7507.72,1884.65 7607.72,1884.65 S2.9@7707.72,1884.65
  Bottom Layer w9.84: C64.2@5987.4,4145 6105,4145 v1(6145,4185)
  Bottom Layer w11.81: J3.8@3675.2,6050 3675.2,6100 3855.51,6100 J3.10@3855.51,6050
  Bottom Layer w19.68: HDR2.10@300,4750 HDR2.8@300,4850 HDR2.6@300,4950 HDR2.4@300,5050 HDR2.2@300,5150 HDR1.10@300,5550 375,5550 435,5610 435,6215 GJ1.2@470,6250 ; LCD1.1@390,4420 390,4560 v2(790,4560) ; v2(583,5928) 583,6000.91 J1.10@708.07,6125.98 ; v1(2085,4275) 2135,4275 2135,4450 ; J2.9@2295.72,6181.89 2342.61,6135 2375,6135 2404.77,6105.23 2404.77,6034.77 2385,6015 v2(2385,5690) ; 2385,5875 JP1.2@2850,5875 ; J2.11@2951.23,6124.98 3163.4,6124.98 J3.16@3238.39,6050 ; GJ2.1@3125,5180 GJ2.2@3225,5180 ; v1(3130,3605) v2(3260,3735) ; JP2.2@3625,5195 JP2.18@4425,5195 ; J3.8@3675.2,6050 J3.7@3585.04,6050 J3.6@3494.88,6050 J3.16@3238.39,6050 ; J3.10@3855.51,6050 J3.17@4222.24,6050 ; 3910.63,6050 J3.5@3910.63,5950 3910.63,5885.63 3875,5850 v1(3765,5850.39) v1(3625,5850) v2(3200,5850) 3200,6011.61 J3.16@3238.39,6050 ; J4.3@4572.05,6165.35 4626.69,6220 5117.4,6220 J5.3@5172.05,6165.35 ; 4980,5180 v2(4980,5240) ; C69.2@5012.6,3960 5012.6,3905 5220,3905 ; C67.2@5012.6,4050 5012.6,4195 5220,4195 ; C63.2@5012.6,4280 5012.6,4335 v1@5220,4335 ; C61.2@5012.6,4490 5012.6,4430 v1(5220,4430) ; C73.2@5155,3662.6 5220,3662.6 v1(5220,3870) ; 5160,5180 v2(5160,5240) ; 5380,3662.6 C71.2@5540,3662.6 ; 5425,4430 5425,4637.4 C58.2@5570,4637.4 ; v2(5430,2930) 5565,2795 5565,2705 5545,2685 v2(5500,2685) C74.2@5440,2685 ; v2(5470,1705) 5470,1750 5460,1760 5460,2240 v2(5525,2240) ; 5555,5070 v2(5555,5125) ; 5780,3870 5780,3662.6 C70.2@5845,3662.6 ; 5780,3910 5987.4,3910 C68.2@5987.4,3965 ; 5780,4200 5987.4,4200 C66.2@5987.4,4055 ; v1@5780,4325 5987.4,4325 C62.2@5987.4,4275 ; 5780,4420 5987.4,4420 C60.2@5987.4,4475 ; 5890,5070 v1(5890,5135) ; 6560,5068 v1(6560,5110) ; GJ4.1@6825,5450 GJ4.2@6925,5450 6925,5315 7150,5090 7429,5090 ; S2.13@7310,1885 v2(7310,2205) ; 7429,5325 7641,5325 7700,5266 HDR5.2@7700,5150 HDR5.4@7700,5050 HDR5.6@7700,4950 HDR5.8@7700,4850 HDR5.10@7700,4750 ; 7600,5326 HDR4.9@7600,5550
  Bottom Layer w39.37: 437,5928 v2(583,5928) ; GJ1.2@470,6250 470,6418 519,6467 6676,6467 6770,6373 J6.2@6770,6204.72 6770,6154.72 ; J1.10@708.07,6125.98 902.09,6320 1497.91,6320 J1.11@1691.93,6125.98 1685,6119.06 1685,5425.18 ; 1685,4725 1685,5434 ; J1.11@1692.93,6124.98 J2.10@1967.37,6124.98 ; J2.10@1967.37,6125.98 J2.10@1967.37,6210 ; J2.10@1967.37,6211.37 2058,6302 2774.21,6302 J2.11@2951.23,6124.98 ; SPKR1.2A@2010.24,5690.55 v2@2384.45,5690.55 ; v2(2224,6240) 2143,6159 2143,5981 2013.39,5851.39 2013.39,4705 v2(2135,4705) 2135,4450 2295,4450 ; v2(2224,6355) 2288,6419 6361,6419 6425,6355 6425,6120 6462.32,6082.68 J6.3@6573.15,6082.68 ; J2.9@2295.72,6181.89 2295.72,6302 ; v2(2725,3910) 2865,3910 ; J3.16@3238.39,6050 3498.39,6310 3962.24,6310 J3.17@4222.24,6050 4485.24,6312.99 J4.S@4700,6312.99 J5.S@5300,6312.99 ; JP2.2@3625,5195 v1(3625,5850) ; GJ5.1@3860,3875 GJ5.2@3960,3875 ; v1(4375,1295) v2(4375,1770) ; 4570,5180 5380,5180 5490,5070 7045,5070 7285,4830 C16.2@7285,4765 ; 4875,115 4875,182 4918,225 4962,225 5005,182 5005,115 ; 5395,3870 5395,3790 5380,3775 5380,2930 v2(5430,2930) ; v1(6045,1340) 6160,1455 6160,1900 6060,2000 6060,2400 6175,2515 6175,2820 6130,2865 6130,3230 v1(6265,3230) v1(6295,3200) ; 6275,115 6275,182 6318,225 6362,225 6405,182 6405,115 ; J9.MH3@6328.63,1035.83 6328.63,913.63 6295,880 6252,880 6120,1012 6120,1275 6260,1415 6260,1940 6160,2040 6160,2360 6275,2475 6275,2858 6190,2943 6190,3035.83 J8.MH3@6328.63,3035.83 ; J8.MH4B@6344.38,3264.17 6375,3233.56 6375,2435 6260,2320 6260,2080 6360,1980 6360,1375 6220,1235 6220,1130 6250,1100 6460,1100 6460,2020 6360,2120 6360,2280 6475,2395 v1(6475,3160) ; 6573.15,5997.24 J6.3B@6573.15,6047.24 ; J6.3@6573.15,6086.61 6623.15,6086.61 ; 7003.15,6086.61 J7.3@7053.15,6086.61 7103.15,6086.61 ; 7053.15,5997.24 J7.3B@7053.15,6047.24 ; 7250,6154.72 J7.2@7250,6204.72 7250,6254.72 ; J7.2B@7289.37,6204.72 7339.37,6204.72
  Bottom Layer w50: GJ7.1@3810,1155 GJ7.2@3910,1155 ; GJ3.1@4915,4920 GJ3.2@5015,4920 ; 5805,4370 6020,4370 6130,4480 6755,4480 7030,4205 7030,3840 7235,3840 C21.2@7235,3925
  Bottom Layer w59.05: HDR9.20@5950,350 6025,350 6025,115 ; HDR10.20@7350,350 7395,350 7430,315
  Bottom Layer w59.06: v2(4675,525) 4675,115 4875,115 ; 5005,115 6275,115 ; 6405,115 7370,115 7430,175 7430,315 7785,670 7785,1920 7635,2070 7635,4559 7429,4765 ; J6.3@6573.15,6082.68 6573.15,6204.72 J6.2@6770,6204.72 7053.15,6204.72 ; J7.3A@7053.15,6145.67 7053.15,6204.72 ; J7.2A@7210.63,6204.72 7053.15,6204.72 ; C16.2@7285,4765 7429,4765 ; C15.2@7285,5325 7429,5325 7429,4765 ; v1(5220,3870) 5780,3870 5780,4430 v1(5220,4430) v1(5220,3870)
  other v1: 175,647 4205,799.21 6460,1270 6185,1340 4375,1512 6375,2835 6475,2835 3540,3225 5965,3485 4475,3855 2900,3865 5580,4075 5790,4480 6300,4480 6265,4800 6230,4965 1010,5415 820,5645
  other v2: 4810,1852.11 4970,1915 4800,2145 4890,2745 2720,2910 6995,3225 3625,3310 3915,3315 3995,3315 3915,3665 3995,3665 2985,3950 5505,5255
GREEN0: J8.10 R12.1 | length 3497.1
  Top Layer w7.87: R12.1@3500,5562.6 3500,5505 3337,5342 3337,4933 3428,4842 3428,3822 3762,3488 4642,3488 4804.33,3325.67 J8.10@4804.33,3256.3
GREEN1: J8.12 R13.1 | length 3566.1
  Top Layer w7.87: R13.1@3590,5562.6 3590,5525 3568,5504 3524,5504 3353,5333 3353,4942 3444,4851 3444,3831 3771,3504 4661,3504 4835.83,3329.17 J8.12@4835.83,3256.3
GREEN#: D2.3 J3.2 R12.2 R13.2 | length 491.3
  Top Layer w7.87: R12.2@3499.9,5637.4 3589.9,5637.4 3589.9,5687.1 3570.31,5706.69 D2.3@3550,5706.69 3550,5866 3586,5902 3628,5902 3639,5913 J3.2@3639,5948.84
HDRIVE: D4.3 J3.13 J8.18 | length 4492.9
  Top Layer w7.87: J3.13@3730.32,6150 3742,6150 3811,6081 3811,6027 3775,5991 3775,5905 3833,5847 3833,5752 3855,5730 3855,5635 3813,5593 3813,5523 3746,5456 3551,5456 3401,5306 3401,4969 3492,4878 3492,3858 3798,3552 4703,3552 4930.31,3324.69 J8.18@4930.31,3256.3 ; 3855,5706.69 D4.3@3900,5706.69
INIT: R26.2 U5.8 U8.74 | length 1323.5
  Top Layer w7.87: U8.74@5824.8,4567.32 5824.8,4525.2 5835,4515 5985,4515 6188,4718 6488,4718 6523.98,4753.98 6523.98,4848.98 6547,4872 6628,4872 6730,4974 R26.2@6730,5100.2
IO0: HDR9.2 J9.7 | length 808.5
  Top Layer w7.87: J9.7@4772.83,1043.7 4772.83,627.17 HDR9.2@5050,350
IO1: HDR9.3 J9.9 | length 936.9
  Top Layer w7.87: J9.9@4804.33,1043.7 4804.33,665.67 5100,370 5100,300 HDR9.3@5150,250
IO2: HDR9.4 J9.11 | length 823.8
  Top Layer w7.87: J9.11@4835.83,1043.7 4835.83,664.17 HDR9.4@5150,350
IO3: HDR9.5 J9.13 | length 952.2
  Top Layer w7.87: J9.13@4867.32,1043.7 4867.32,702.68 5200,370 5200,300 HDR9.5@5250,250
IO4: HDR9.6 J9.15 | length 839.2
  Top Layer w7.87: J9.15@4898.82,1043.7 4898.82,701.18 HDR9.6@5250,350
IO5: HDR9.7 J9.17 | length 967.5
  Top Layer w7.87: J9.17@4930.31,1043.7 4930.31,739.69 5300,370 5300,300 HDR9.7@5350,250
IO6: HDR9.8 J9.19 | length 854.5
  Top Layer w7.87: J9.19@4961.81,1043.7 4961.81,738.19 HDR9.8@5350,350
IO7: HDR9.9 J9.21 | length 982.9
  Top Layer w7.87: J9.21@4993.31,1043.7 4993.31,776.69 5400,370 5400,300 HDR9.9@5450,250
IO8: HDR9.10 J9.23 | length 869.8
  Top Layer w7.87: J9.23@5024.8,1043.7 5024.8,775.2 HDR9.10@5450,350
IO9: HDR9.11 J9.25 | length 998.2
  Top Layer w7.87: J9.25@5056.3,1043.7 5056.3,813.7 5500,370 5500,300 HDR9.11@5550,250
IO10: HDR9.12 J9.27 | length 885.2
  Top Layer w7.87: J9.27@5087.79,1043.7 5087.79,812.21 HDR9.12@5550,350
IO11: HDR9.13 J9.29 | length 1013.5
  Top Layer w7.87: J9.29@5119.29,1043.7 5119.29,850.71 5600,370 5600,300 HDR9.13@5650,250
IO12: HDR9.14 J9.31 | length 900.5
  Top Layer w7.87: J9.31@5150.79,1043.7 5150.79,849.21 HDR9.14@5650,350
IO13: HDR9.15 J9.33 | length 1028.9
  Top Layer w7.87: J9.33@5182.28,1043.7 5182.28,887.72 5700,370 5700,300 HDR9.15@5750,250
IO14: HDR9.16 J9.35 | length 915.8
  Top Layer w7.87: J9.35@5213.78,1043.7 5213.78,886.22 HDR9.16@5750,350
IO15: HDR9.17 J9.37 | length 1044.2
  Top Layer w7.87: J9.37@5245.28,1043.7 5245.28,924.72 5800,370 5800,300 HDR9.17@5850,250
IO16: HDR9.18 J9.39 | length 931.1
  Top Layer w7.87: J9.39@5276.77,1043.7 5276.77,923.23 HDR9.18@5850,350
IO17: HDR9.19 J9.41 | length 1059.5
  Top Layer w7.87: J9.41@5308.27,1043.7 5308.27,961.73 5900,370 5900,300 HDR9.19@5950,250
IO18: HDR10.2 J9.43 | length 1446.5
  Top Layer w7.87: J9.43@5339.76,1043.7 5339.76,960.24 5892,408 6392,408 HDR10.2@6450,350
IO19: HDR10.3 J9.45 | length 1601.2
  Top Layer w7.87: J9.45@5371.26,1043.7 5371.26,953.74 5901,424 6446,424 6500,370 6500,300 HDR10.3@6550,250
IO20: HDR10.4 J9.47 | length 1491.1
  Top Layer w7.87: J9.47@5402.76,1043.7 5402.76,947.24 5910,440 6460,440 HDR10.4@6550,350
IO21: HDR10.5 J9.49 | length 1645.8
  Top Layer w7.87: J9.49@5434.25,1043.7 5434.25,940.75 5919,456 6514,456 6600,370 6600,300 HDR10.5@6650,250
IO22: HDR10.6 J9.51 | length 1535.7
  Top Layer w7.87: J9.51@5465.75,1043.7 5465.75,934.25 5928,472 6528,472 HDR10.6@6650,350
IO23: HDR10.7 J9.53 | length 1690.4
  Top Layer w7.87: J9.53@5497.24,1043.7 5497.24,927.76 5937,488 6582,488 6700,370 6700,300 HDR10.7@6750,250
IO24: HDR10.8 J9.55 | length 1580.3
  Top Layer w7.87: J9.55@5528.74,1043.7 5528.74,921.26 5946,504 6596,504 HDR10.8@6750,350
IO25: HDR10.9 J9.57 | length 1735.1
  Top Layer w7.87: J9.57@5560.24,1043.7 5560.24,914.76 5955,520 6650,520 6800,370 6800,300 HDR10.9@6850,250
IO26: HDR10.10 J9.59 | length 1624.9
  Top Layer w7.87: J9.59@5591.73,1043.7 5591.73,908.27 5964,536 6664,536 HDR10.10@6850,350
IO27: HDR10.11 J9.61 | length 1779.7
  Top Layer w7.87: J9.61@5623.23,1043.7 5623.23,901.77 5973,552 6718,552 6900,370 6900,300 HDR10.11@6950,250
IO28: HDR10.12 J9.63 | length 1669.6
  Top Layer w7.87: J9.63@5654.72,1043.7 5654.72,895.28 5982,568 6732,568 HDR10.12@6950,350
IO29: HDR10.13 J9.65 | length 1824.3
  Top Layer w7.87: J9.65@5686.22,1043.7 5686.22,888.78 5991,584 6786,584 7000,370 7000,300 HDR10.13@7050,250
IO30: HDR10.14 J9.67 | length 1714.2
  Top Layer w7.87: J9.67@5717.72,1043.7 5717.72,882.28 6000,600 6800,600 HDR10.14@7050,350
IO31: HDR10.15 J9.69 | length 1868.9
  Top Layer w7.87: J9.69@5749.21,1043.7 5749.21,875.79 6009,616 6854,616 7100,370 7100,300 HDR10.15@7150,250
IO32: HDR10.16 J9.71 | length 1758.8
  Top Layer w7.87: J9.71@5780.71,1043.7 5780.71,869.29 6018,632 6868,632 HDR10.16@7150,350
IO33: HDR10.17 J9.73 | length 1913.5
  Top Layer w7.87: J9.73@5812.21,1043.7 5812.2,862.79 6027,648 6922,648 7200,370 7200,300 HDR10.17@7250,250
IO34: HDR10.18 J9.75 | length 1803.4
  Top Layer w7.87: J9.75@5843.7,1043.7 5843.7,856.3 6036,664 6936,664 HDR10.18@7250,350
IO35: HDR10.19 J9.77 | length 1958.2
  Top Layer w7.87: J9.77@5875.2,1043.7 5875.2,849.8 6045,680 6990,680 7300,370 7300,300 HDR10.19@7350,250
JIOA0: J8.3 R45.1 RA19.5 RA20.4 | length 1295.1
  Top Layer w7.87: R45.1@3640,3122.4 3640,3155 3650,3165 3953,3165 3965,3153 RA19.5@3965,3122 3998,3122 4040,3080 4170,3080 4215,3035 RA20.4@4215,2998 4252,2998 4280,2970 4700,2970 4709.84,2979.84 J8.3@4709.84,3043.7
JIOA0#: HDR2.1 RA20.5 | length 5344.2
  Top Layer w7.87: HDR2.1@200,5150 200,5100 320,5100 350,5070 350,5010 428,4932 2598,4932 2950,4580 2950,3938 3618,3270 4150,3270 4215,3205 RA20.5@4215,3122
JIOA1: J8.5 RA19.6 RA20.3 | length 1029.4
  Top Layer w7.87: RA19.6@3915,3122 3915,3090 3925,3080 4010,3080 4030,3060 4140,3060 4165,3035 4165,2965 4176,2954 4714,2954 4741.34,2981.34 J8.5@4741.34,3043.7
JIOA1#: HDR2.3 RA20.6 | length 5187.7
  Top Layer w7.87: HDR2.3@200,5050 242,5008 327,5008 419,4916 2589,4916 2934,4571 2934,3930 3610,3254 4116,3254 4165,3205 RA20.6@4165,3122
JIOA2: J8.7 RA19.7 RA20.2 | length 1123.2
  Top Layer w7.87: RA19.7@3865,3122 3865,3085 3890,3060 4000,3060 4020,3040 4105,3040 4115,3030 4115,2965 4142,2938 4728,2938 4772.83,2982.83 J8.7@4772.83,3043.7
JIOA2#: HDR2.5 RA20.7 | length 5093.9
  Top Layer w7.87: HDR2.5@200,4950 250,4900 2580,4900 2918,4562 2918,3920 3600,3238 4077,3238 4115,3200 RA20.7@4115,3122
JIOA3: J8.9 RA20.1 | length 881.2
  Top Layer w7.87: RA20.1@4065,2998 4065,2960 4103,2922 4747,2922 4804.33,2979.33 J8.9@4804.33,3043.7
JIOA3#: HDR2.7 RA20.8 | length 5059.8
  Top Layer w7.87: HDR2.7@200,4850 250,4800 310,4800 394,4884 2571,4884 2902,4553 2902,3912 3592,3222 4023,3222 4065,3180 RA20.8@4065,3122
JIOB0: J8.83 RA17.1 | length 766.5
  Top Layer w7.87: J8.83@5969.69,3043.7 5969.69,3109.69 6021,3161 6331,3161 6398,3228 6398,3322 6330,3390 RA17.1@6330,3423
JIOB0#: HDR5.1 RA17.8 | length 2486.4
  Top Layer w7.87: RA17.8@6330,3547 6330,3580 6572,3822 6882,3822 6972,3912 6972,4602 7018,4648 7278,4648 7528,4898 7528,5118 7560,5150 HDR5.1@7600,5150
JIOB1: J8.85 RA17.2 | length 740.1
  Top Layer w7.87: J8.85@6001.18,3043.7 6001.18,3106.18 6040,3145 6340,3145 6414,3219 6414,3356 6380,3390 RA17.2@6380,3423
JIOB1#: HDR5.3 RA17.7 | length 2342.2
  Top Layer w7.87: RA17.7@6380,3547 6380,3605 6581,3806 6891,3806 6988,3903 6988,4593 7027,4632 7287,4632 7544,4889 7544,4994 HDR5.3@7600,5050
JIOB2: J8.87 RA17.3 | length 716.7
  Top Layer w7.87: J8.87@6032.68,3043.7 6032.68,3107.68 6054,3129 6349,3129 6430,3210 RA17.3@6430,3423
JIOB2#: HDR5.5 RA17.6 | length 2221.5
  Top Layer w7.87: RA17.6@6430,3547 6430,3630 6590,3790 6900,3790 7004,3894 7004,4584 7036,4616 7296,4616 7560,4880 7560,4910 HDR5.5@7600,4950
JIOB3: J8.89 RA17.4 | length 717.9
  Top Layer w7.87: J8.89@6064.17,3043.7 6064.17,3103.17 6074,3113 6358,3113 6446,3201 6446,3356 6480,3390 RA17.4@6480,3423
JIOB3#: HDR5.7 RA17.5 | length 2127.2
  Top Layer w7.87: RA17.5@6480,3547 6480,3655 6599,3774 6909,3774 7020,3885 7020,4575 7045,4600 7305,4600 7555,4850 HDR5.7@7600,4850
JTAG_CNCT_A: R70.1 RA25.2 U8.106 | length 8488.7
  Top Layer w7.87: R70.1@275,447.4 275,555 265,565 160,565 145,580 145,680 185,720 v1(390,720) ; v2(3705,4355) 3744,4394 3804,4394 3920,4510 4795,4510 4870,4585 5015,4585 5058,4628 5177,4628 5194.88,4610.12 U8.106@5194.88,4567.32
  Bottom Layer w7.87: v1(390,720) 390,870 373,887 373,3078 953,3658 2738,3658 3270,4190 3540,4190 v2(3705,4355)
JTAG_CNCT_A#: HDR6.10 R70.2 | length 383.4
  Top Layer w7.87: R70.2@347.4,445 385,445 580,250 HDR6.10@650,250
JTAG_CNCT_B: R69.1 RA25.1 U8.131 | length 8932.3
  Top Layer w7.87: RA25.1@225,523 125,523 125,685 176,736 301,736 405,840 v1(940,840) ; v2(3975,4040) 3998,4063 3998,4263 4037,4302 4748,4302 4806,4244 4806,4054 4825,4035 4875,4035 4901.42,4061.42 U8.131@5082.68,4061.42
  Bottom Layer w7.87: v1(940,840) 914,866 719,866 581,1004 581,2961 1070,3450 2855,3450 3387,3982 3917,3982 v2(3975,4040)
JTAG_CNCT_B#: HDR7.10 R69.2 | length 1589.7
  Top Layer w7.87: R69.2@125,447.6 177.4,447.6 240,385 345,385 580,150 1450,150 HDR7.10@1550,250
KBCLOCK: J4.5 J8.22 RA2.1 | length 4820.3
  Top Layer w7.87: J4.5@4572.05,6066.93 4409,5903.88 4409,5774 4401.57,5766.57 4266.57,5766.57 4225,5725 RA2.1@4225,5678 4183,5678 4155,5650 3920,5650 3845,5575 3845,5505 3764,5424 3569,5424 3433,5288 3433,4987 3524,4896 3524,3876 3816,3584 4731,3584 4993.31,3321.69 J8.22@4993.31,3256.3
KBDATA: J4.1 J8.24 RA2.2 | length 5003.6
  Top Layer w7.87: J4.1@4650.79,6165.35 4617,6131.57 4617,6046 4594,6023 4553.39,6023 4424.75,5894.36 4424.75,5763.75 4411.82,5750.82 4295.82,5750.82 4275,5730 RA2.2@4275,5678 4275,5645 4264,5634 3929,5634 3861,5566 3861,5496 3773,5408 3578,5408 3449,5279 3449,4996 3540,4905 3540,3885 3825,3600 4750,3600 5024.8,3325.2 J8.24@5024.8,3256.3
LCD_BCKL: J9.22 R35.1 | length 5212.7
  Top Layer w7.87: v2(1905,3800) 1935,3800 4192,1543 4805,1543 4993.31,1354.69 J9.22@4993.31,1256.3 ; R35.1@2300,4587.6 2300,4555 2315,4540 v2(2350,4540)
  Bottom Layer w7.87: v2(1905,3800) 2350,4245 v2(2350,4540)
LCD_D0: LCD1.7 RA11.1 U17.9 | length 5899.2
  Top Layer w7.87: RA11.1@1065,4573 1065,4540 990,4465 LCD1.7@990,4420 1140,4270 1590,4270 4237,1623 4883.81,1623 4979.81,1527 5287,1527 5409.57,1649.57 U17.9@5409.57,1696.06
LCD_D1: LCD1.8 RA11.2 U17.8 | length 5740
  Top Layer w7.87: RA11.2@1115,4573 1115,4500 1090,4475 LCD1.8@1090,4420 1220,4290 1595,4290 4246,1639 4890.08,1639 4986.08,1543 5278,1543 5383.98,1648.98 U17.8@5383.98,1696.06